# Altium PCB Control_Circuit_PCB.PcbDoc
Units mm, origin at the board's own origin, x right, y up, seen from the top; angles counter-clockwise.
Board outline 272.77 x 93.2 mm, 2 copper layers (Top Layer, Bottom Layer); 14 components, 8 nets, 34 pads, 2 vias.
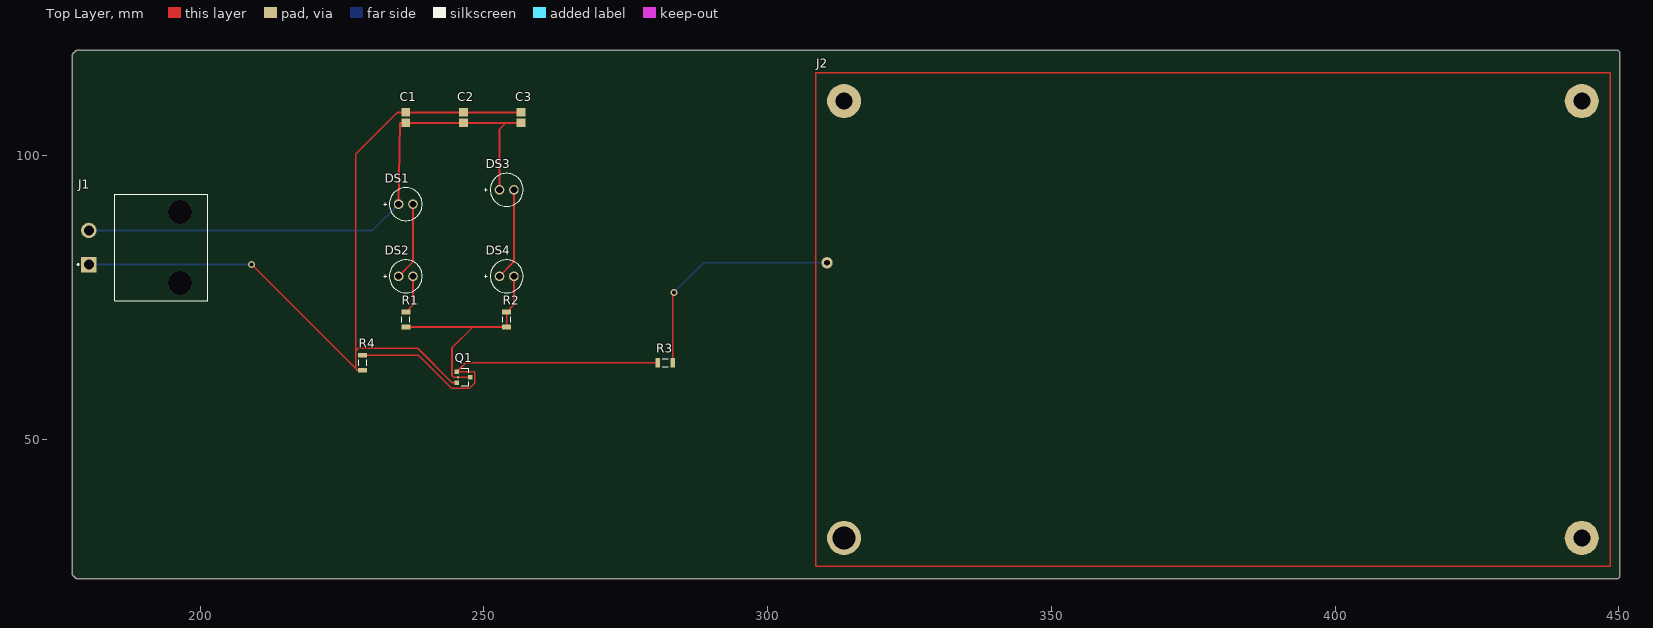
[diagram p0: Top Layer view]
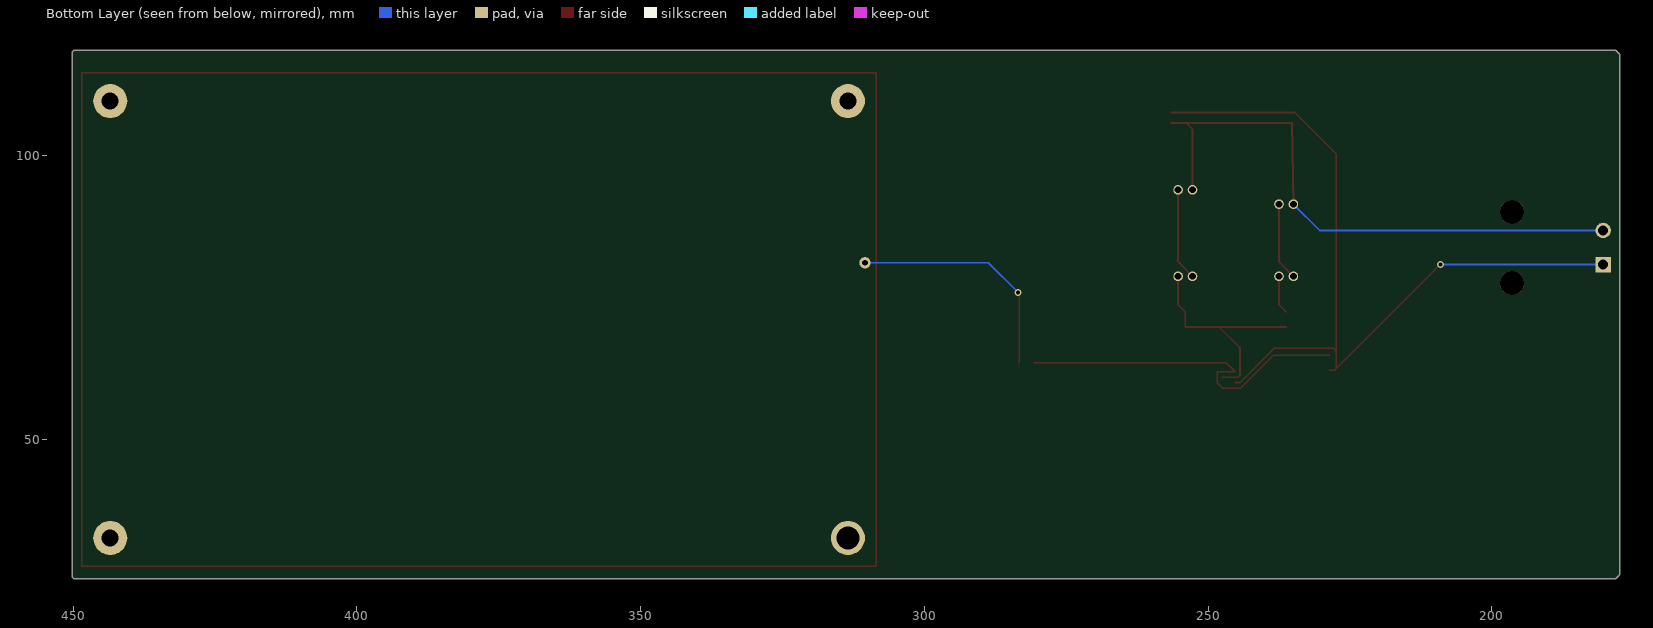
[diagram p1: Bottom Layer view, seen from below]

## Layer stack, top to bottom
Top Solder: solder mask 0.0102, Solder Resist, Dk 3.5
Top Layer: signal copper 0.0356
Dielectric 1: dielectric 0.32, FR-4, Dk 4.8
Bottom Layer: signal copper 0.0356
Bottom Solder: solder mask 0.0102, Solder Resist, Dk 3.5

## Board outline
177.412,26.388 ccw(c178.012,26.388) 177.828,25.816 ccw(c178.4,26) 178.4,25.4 449.58,25.4 ccw(c449.58,26) 450.18,26 450.18,118 ccw(c449.58,118) 449.58,118.6 178.4,118.6 ccw(c178.4,118) 177.828,118.184 ccw(c178.012,117.612) 177.412,117.612

## Design rules (kind name [scope] priority, off if disabled: settings)
Clearance [All] p1: gap=0.254 ignorepadtopadclearanceinfootprint=FALSE
HoleSize [All] p1: absolutevalues=TRUE maxlimit=7 minlimit=0.025 maxpercent=80.000 minpercent=20.000
PolygonConnect [All] p1: connectstyle=Relief reliefconductorwidth=0.254 reliefentries=4 polygonreliefangle="90 Angle" airgapwidth=0.254
RoutingVias [All] p1: holewidth=0.711 width=1.27 viastyle="Through Hole" minholewidth=0.711 minwidth=1.27 maxholewidth=0.711 maxwidth=1.27
SolderMaskExpansion [All] p1: expansion=0 istentingtop=FALSE
Width [All] p1: maxlimit=0.5 minlimit=0.254 preferedwidth=0.3
29 further rules are at their usual default settings.

## Components (designator, comment, footprint, x,y, rotation, side; value= is the part's Value field where it differs from the comment)
C1 "100uF" CAPC2013X145X48ML20T23 236.22,106.68 r270 top
C2 "1uF" CAPC2013X145X48ML20T23 246.38,106.68 r270 top
C3 "100nF" CAPC2013X145X48ML20T23 256.54,106.68 r270 top
DS1 "TSAL6200" VISH-TSAL6200 236.22,91.44 r0 top
DS2 "TSAL6200" VISH-TSAL6200 236.22,78.74 r0 top
DS3 "TSAL6200" VISH-TSAL6200 254,93.98 r0 top
DS4 "TSAL6200" VISH-TSAL6200 254,78.74 r0 top
J1 "1-1969694-2" FP-1-1969694-2-MFG 193.04,83.82 r90 top
J2 "PYNQZ2" PYNQZ2_board 378.46,71.12 r180 top
Q1 "AO3400A" FP-SOT23-MFG 246.38,60.96 r0 top
R1 "30" RESC3116X65X40LL10T20 236.22,71.12 r90 top
R2 "30" RESC3116X65X40LL10T20 254,71.12 r90 top
R3 "330" RESC3116X65X40LL10T20 281.94,63.5 r0 top
R4 "10k" RESC3116X65X40LL10T20 228.6,63.5 r90 top

## Footprints (in the part's own frame and the unit in brackets; to place one, negate y for a bottom-side part, rotate by r counter-clockwise, add the part's x,y. Pads: shape width x height; smd on the part's side, far side on the other; paste and mask are expansions set on the pad)
CAPC2013X145X48ML20T23 [mm] "Chip Capacitor, 2-Leads, Body 2.00x1.25mm, IPC Low Density"
  rect 1.5x1.55 smd: 1(-0.925,0) 2(0.925,0)
  body extent -1.1,-0.72 1.1,0.72, height 1.45
FP-1-1969694-2-MFG [mm]
  rect 2.73x2.73 hole 1.78 paste-2539.97 mask+0: 1(-3.005,12.67)
  round 2.73 hole 1.78 paste-2539.97 mask+0: 2(2.995,12.67)
  round 4.22 hole 4.22 unplated paste-2539.97 mask+0: ""(-6.275,-3.4) ""(6.275,-3.4)
  silkscreen extent -9.36,-8.28 9.36,14.71, body extent -9.47,-8.38 9.47,14.14, height 0.25
FP-SOT23-MFG [mm]
  rect 0.8x0.8 smd paste+0 mask+0: 1(-1.2,0.95) 2(-1.2,-0.95) 3(1.2,0)
  silkscreen extent -0.9,-1.55 0.9,1.55, body extent -1.7,-1.78 1.7,1.78, height 0.25
PYNQZ2_board [mm]
  round 6 hole 3: 0(-65,-38.5) 0(-65,38.5) 0(65,-38.5)
  round 6 hole 4: 0(65,38.5)
  round 2 hole 1: 1(68,-10)
  Top Layer lines w0.254: 70,43.5 70,-43.5 -70,-43.5 -70,43.5 70,43.5
RESC3116X65X40LL10T20 [mm] "Chip Resistor, 2-Leads, Body 3.10x1.60mm, IPC High Density"
  rect 0.85x1.6 smd: 1(-1.325,0) 2(1.325,0)
  silkscreen extent -0.5,-0.7 0.5,0.7, body extent -1.6,-0.85 1.6,0.85, height 0.65
VISH-TSAL6200 [mm] "THD, 2-Leads, Dia 5.8mm, Pitch 2.54mm"
  round 1.7 hole 1.2: 1(-1.27,0) 2(1.27,0)
  silkscreen extent -3.9,-2.9 2.9,2.9

## Part data
C1 C2 C3: library part CMP-2007-03205-1, Manufacturer=Vitramon, Part Number=VJ0805Y682KXAMT
DS1 DS2 DS3 DS4: library part CMP-2000-07327-1, "High Power Infrared Emitting Diode, GaAlAs, MQW, 1.35 V, 100 mA, -40 to 85 degC, 2-Pin THD, RoHS, Bulk", Forward Current=100mA, Forward Voltage=3V, Manufacturer=Vishay, Operating Temp Range=-40Cto85C, Operating Temperature Classification=Industrial, Package Description="2-Pin Through Hole Device, Dia 5.8 mm, Pitch 2.54 mm", Package Type=T-13/4, Power Dissipation=160W, Reverse Voltage=5V, Chip Material=GaAlAs, Datasheet URL=http://www.vishay.com/docs/81010/tsal6200.pdf, Datasheet Version="Rev. 2.4, 03/2014", DELETED=Compliant, High Brightness=Yes, Lens Dimensions=5x5x7.7mm, Lens Type=Colored, Lum Intensity=500mW/srmcd, Luminous Intensity=500mW/sr, Main Category=IrLED, Manufacturer URL=http://www.vishay.com/, Mounting=ThroughHole, Mounting Technology=ThroughHole, Number of  Elements=1, Package Reference=TSAL6200, Packaging=Bulk, Peak Wavelength=950nm, Pin Count=2, Product Depth (mm)=5.8mm, Product Height (mm)=8.7mm, Product Length (mm)=5.8mm, Rad Hardened=No, Shape Type=Circular, Test Current (It)=100mA, Type=IrLED, Viewing Angle=34deg
J1: library part CMP-03373-000004-1, "CONN HEADER R/A 2POS 6MM", Contact Current Rating=19.5A, Flammability Rating="UL94 V-0", Housing Color=Grey, Max Operating Temperature=150°C, Min Operating Temperature=-55°C, Number of Power Positions=2, Approvals=VDE, Circuit Application=Power, Connector System=Wire-to-Board, Connector Type=Tab, Contact Material="Copper Alloy", Contact Plating=Tin, Contact Retention="Yes (With)", Housing Material=Nylon, Mating Retention="Yes (With)", Number of Positions=2, Number of Rows=1, Packaging=Carton, PCB Mount Alignment="Yes (With)", PCB Mounting Orientation="Right Angle", Pitch=6mm, Sealable="No (Without)", Termination="Through Hole", VDE Tested=Yes
Q1: library part CMP-83955-000006-1, "MOSFET N-CH 30V 5.7A SOT23", Case/Package=SOT-23, Continuous Drain Current (ID)=5.7A, Drain to Source Voltage (Vdss)=30V, Gate to Source Voltage (Vgs)=12V, Input Capacitance=630pF, Max Operating Temperature=150°C, Max Power Dissipation=1.4W, Min Operating Temperature=-55°C, Lead Free="Lead Free", Mount="Surface Mount", Number of Elements=1, Number of Pins=3, Packaging="Tape and Reel", Power Dissipation=1.4W, Radiation Hardening=No, Rds On Max=26.5mR
R1 R2 R3 R4: library part CMP-2003-04964-1, Manufacturer=Yageo, Part Number=RC1206FR-10750RL

## Via types
v1: diameter 1.27, hole 0.711, Top Layer to Bottom Layer, 2 vias

## Nets (pads, with @x,y where several pads share a name; then routed paths per layer and width w, separated by ;. In a path a pad name is that pad's centre, name@x,y a point inside that pad or via, vN(x,y) a via of type N, cw(c..) or ccw(c..) an arc to the next point about the centre after c; other vN are vias at no path point)
NetC1_1: C1.1 C2.1 C3.1 J1.1 Q1.2 R4.1 | length 146.5
  Top Layer w0.3: v1(209.05,80.815) 227.381,62.484 ; R4.1 227.69,62.175 227.381,62.484 ; Q1.2 244.333,60.01 238.303,66.04 227.889,66.04 227.381,65.532 ; C3.1 C2.1 C1.1 234.696,107.605 227.381,100.29 227.381,65.532 ; 227.381,62.484 227.381,65.532
  Bottom Layer w0.3: J1.1 v1(209.05,80.815)
NetC1_2: C1.2 C2.2 C3.2 DS1.1 DS3.1 J1.2 | length 104.4
  Top Layer w0.3: DS1.1 235.204,105.755 C1.2 C2.2 253.837,105.755 ; DS3.1 252.73,104.648 253.837,105.755 ; C3.2 253.837,105.755
  Bottom Layer w0.3: J1.2 230.325,86.815 DS1.1
NetDS1_2: DS1.2 DS2.1 | length 13.8
  Top Layer w0.3: DS2.1 237.49,81.28 DS1.2
NetDS2_2: DS2.2 R1.2 | length 6.8
  Top Layer w0.3: R1.2 237.49,73.715 DS2.2
NetDS3_2: DS3.2 DS4.1 | length 16.3
  Top Layer w0.3: DS4.1 255.27,81.28 DS3.2
NetDS4_2: DS4.2 Q1.3 R1.1 R2.1 R2.2 | length 40.7
  Top Layer w0.3: R1.1 248.052,69.795 ; Q1.3 244.627,60.96 244.373,61.214 244.373,66.116 248.052,69.795 ; DS4.2 255.27,73.715 R2.2 R2.1 248.052,69.795
NetJ2_1: J2.1 R3.2 | length 41.6
  Top Layer w0.3: R3.2 283.265,75.671 v1(283.464,75.87)
  Bottom Layer w0.3: v1(283.464,75.87) 288.714,81.12 J2.1
NetQ1_1: Q1.1 R3.1 R4.2 | length 63.9
  Top Layer w0.3: R4.2 238.451,64.825 244.272,59.004 247.447,59.004 248.387,59.944 248.387,61.91 Q1.1 246.77,63.5 R3.1
pads on no net: J1. J2.0

## Silkscreen, mask and mechanical layers (free items; w line width, h text height)
Mechanical 1:
  lines w0.254: 178.012,26.388 178.4,26 328.4,26 329.4,27 329.4,28 329.4,118 178.4,118 178.012,117.612 178.012,26.388
  lines w1.2: 178.012,26.388 178.012,117.612 178.4,118 449.58,118 449.58,26 178.4,26 178.012,26.388